# Altium PCB stm32dev.PcbDoc (part 1 of 2)
Units mm, origin at the board's own origin, x right, y up, seen from the top; angles counter-clockwise.
Board outline 57 x 44 mm, 4 copper layers (Top Layer (Signal), Int1 (GND), Int2 (PWR), Bottom Layer (Signal)), stack 1.57 mm thick; 42 components, 50 nets, 191 pads, 142 vias.
Unrouted connection lines stored in the file: 5.
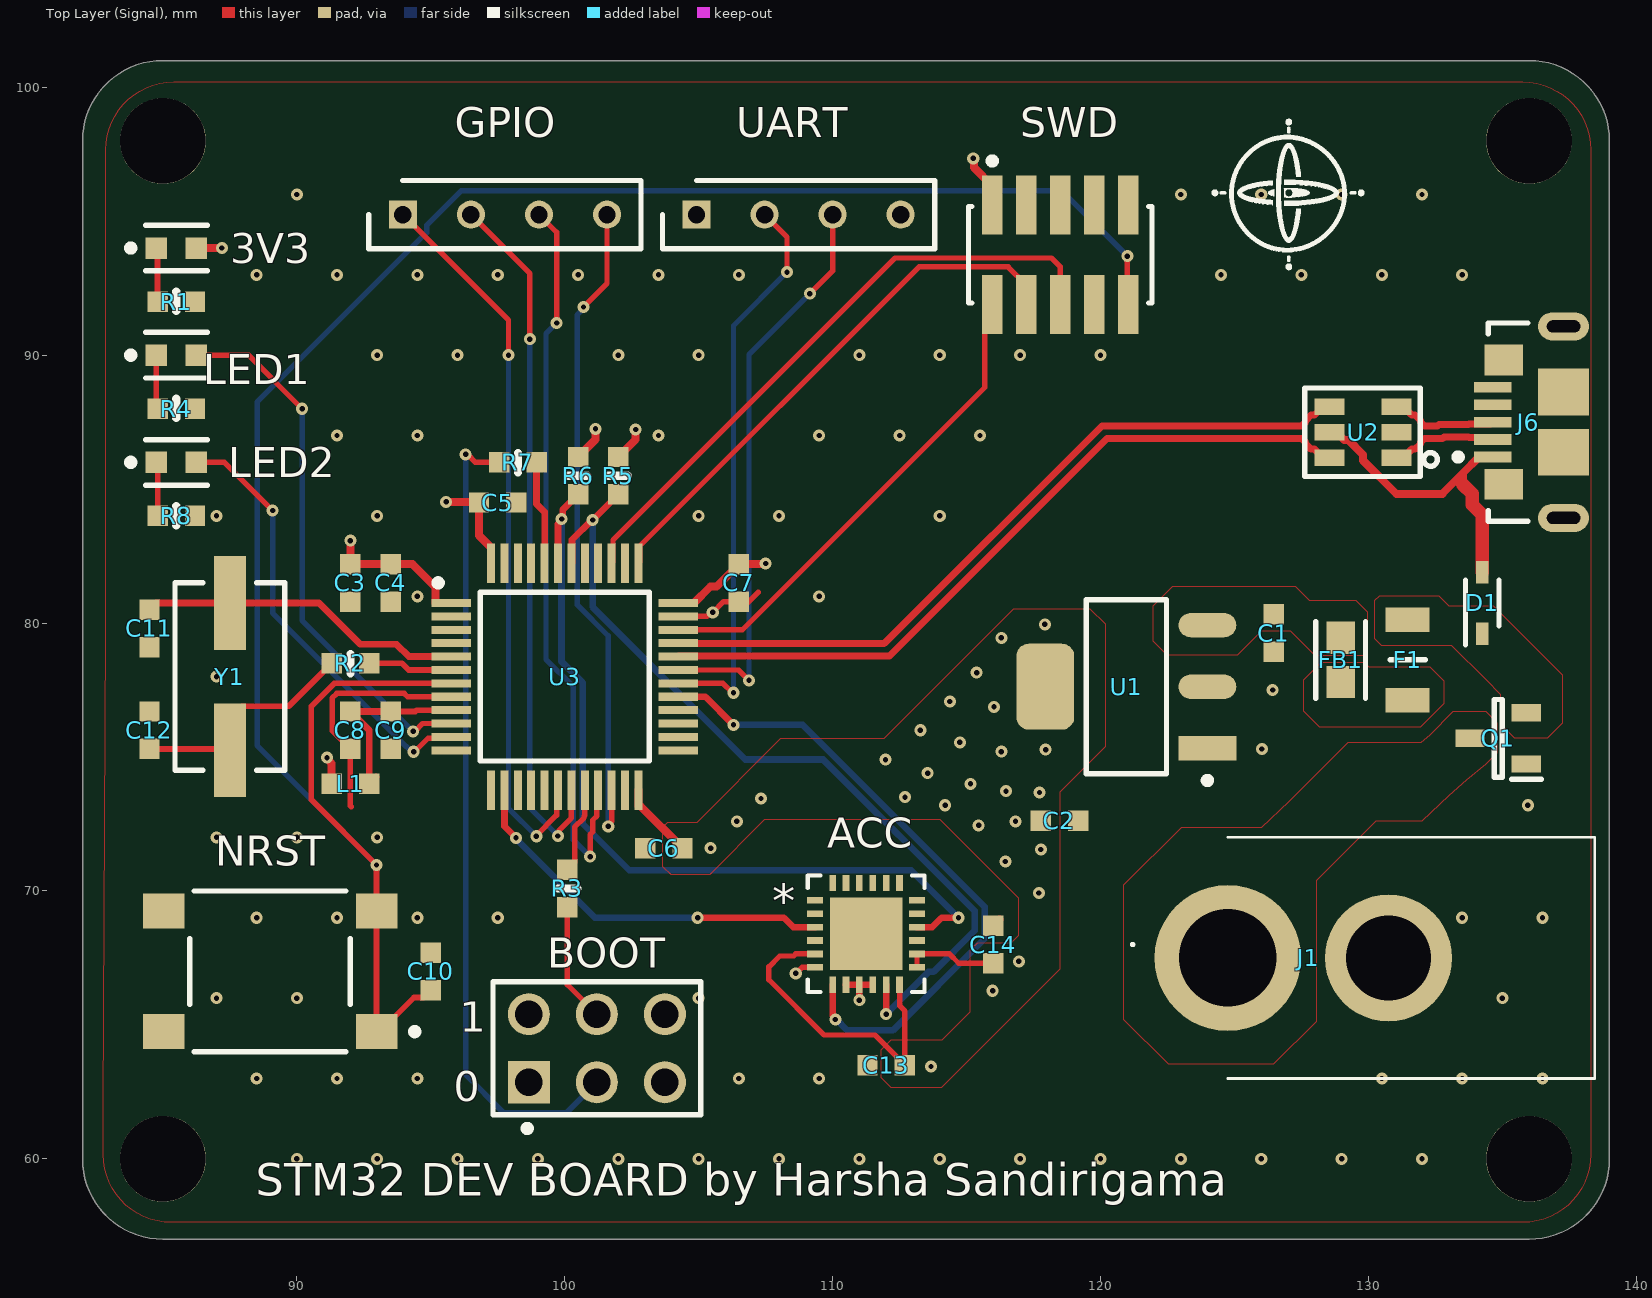
[diagram p0: Top Layer (Signal) view]
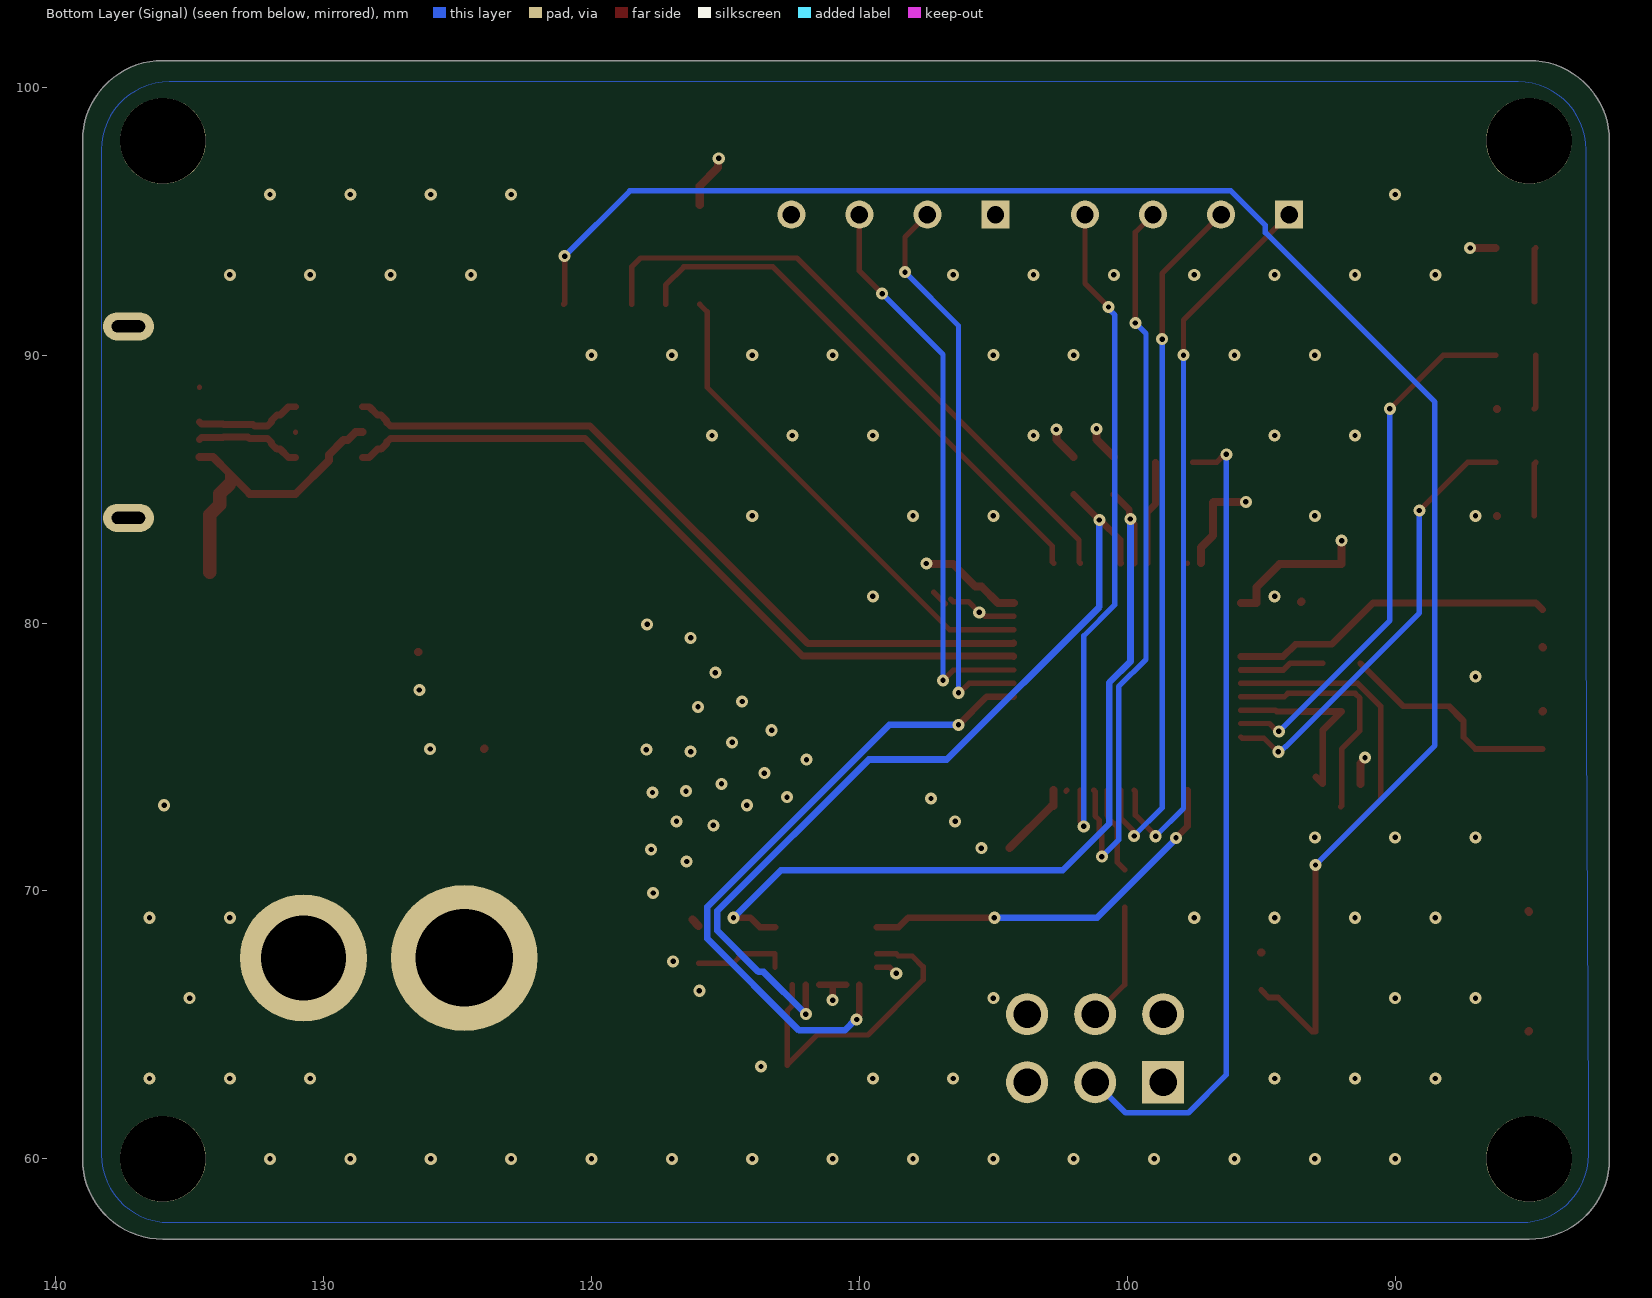
[diagram p1: Bottom Layer (Signal) view, seen from below]
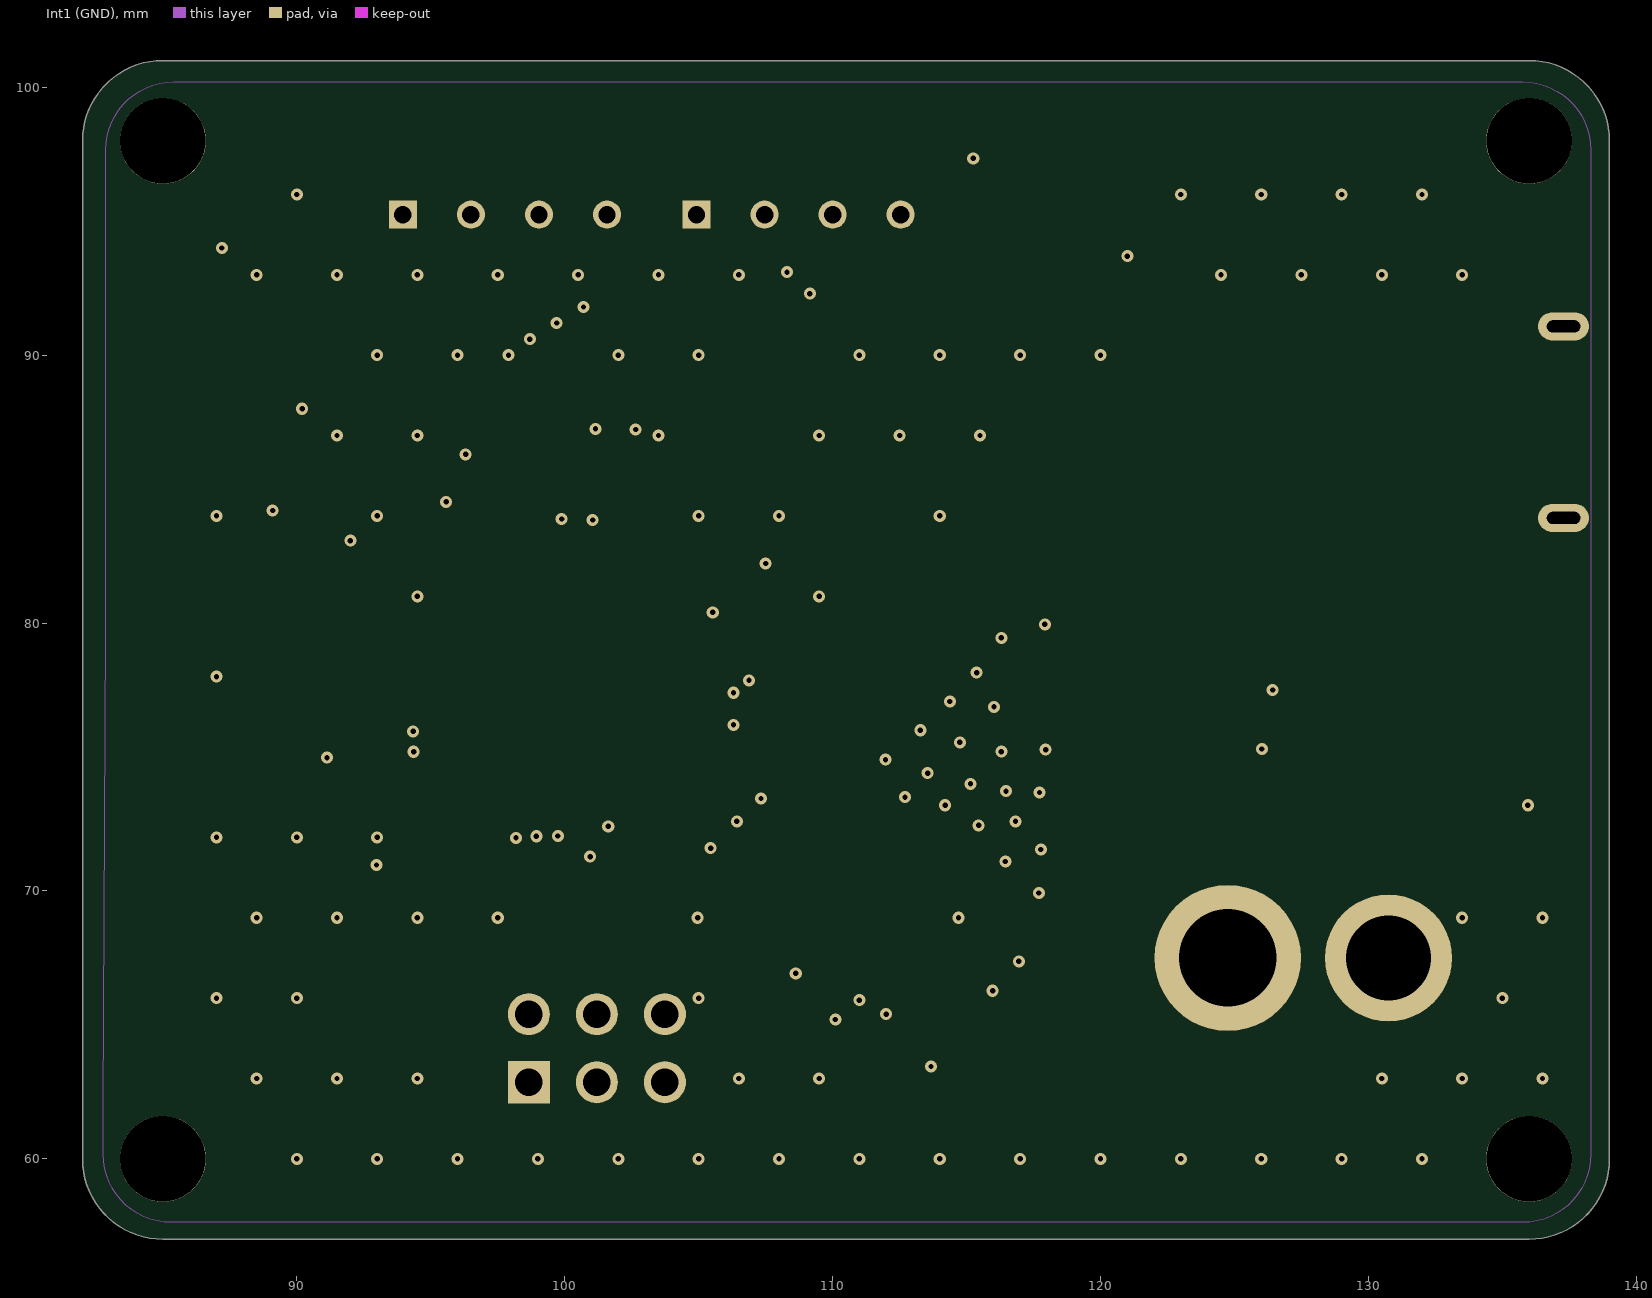
[diagram p2: Int1 (GND)]
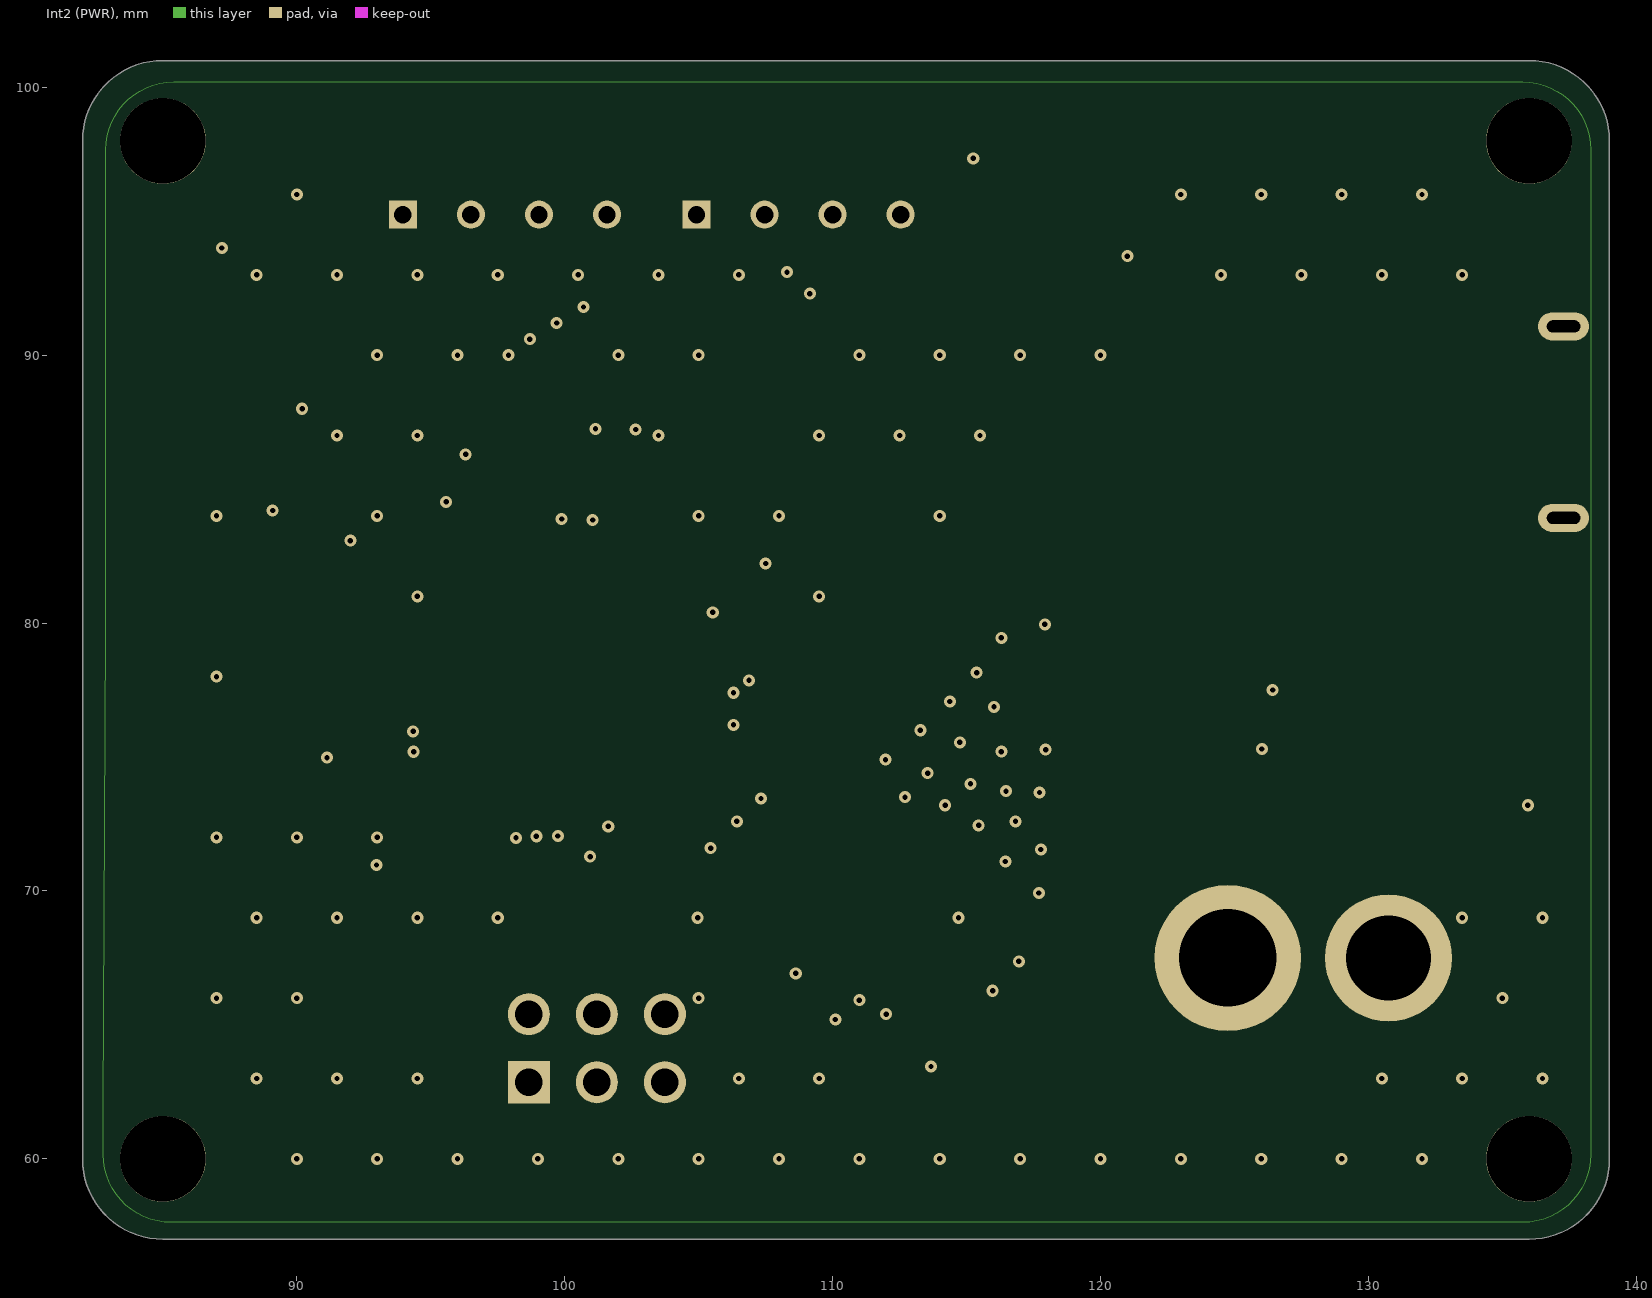
[diagram p3: Int2 (PWR)]
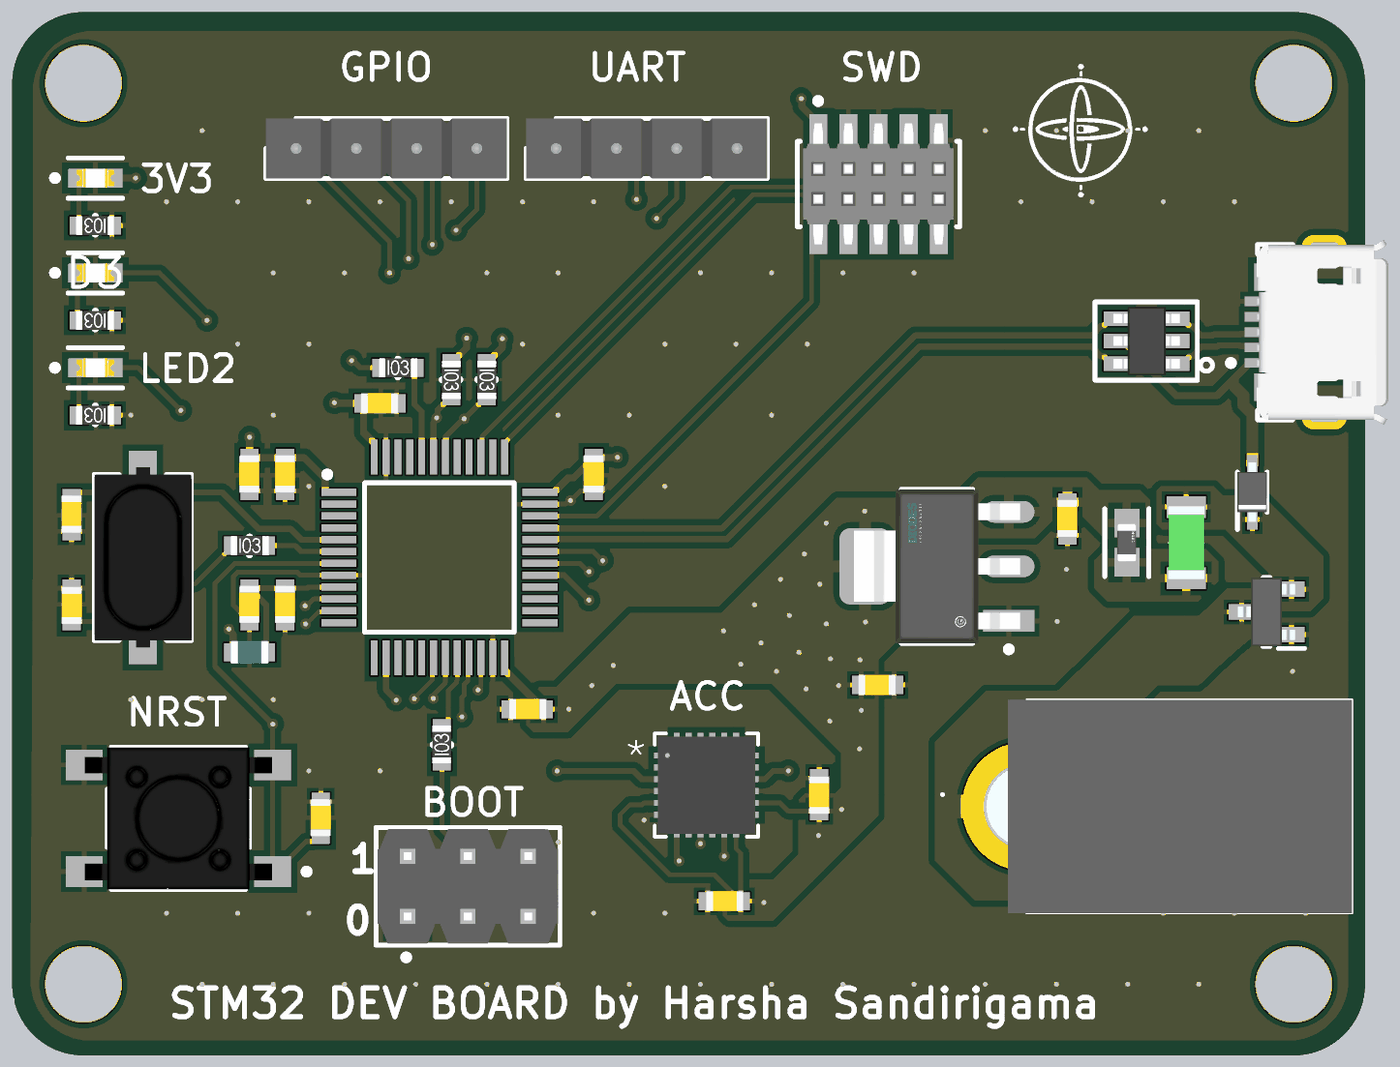
[diagram p4: 3D render of the assembled board from above, using the file's embedded part models]

## Layer stack, top to bottom
Top Solder: solder mask 0.0254, SM-001, Dk 4
Top Layer (Signal): signal copper 0.035
Dielectric 1: prepreg 0.2, PP-017, Dk 4.6
Int1 (GND): signal copper 0.0175
Dielectric 3: core 1.065, Core-039, Dk 4.6
Int2 (PWR): signal copper 0.0175
Dielectric 5: prepreg 0.2, PP-017, Dk 4.6
Bottom Layer (Signal): signal copper 0.035
Bottom Solder: solder mask 0.0254, SM-001, Dk 4

## Board outline
82,60 82,98 cw(c85,98) 85,101 136,101 cw(c136,98) 139,98 139,60 cw(c136,60) 136,57 85,57 cw(c85,60)

## Design rules (kind name [scope] priority, off if disabled: settings)
BoardOutlineClearance [All] p1: gap=0.3 ignorepadtopadclearanceinfootprint=FALSE
Clearance [All] p1: gap=0.254 ignorepadtopadclearanceinfootprint=TRUE except(0.127: Arc-Arc Arc-Track Track-Track SMDPad-SMDPad; 0.2: Arc-SMDPad Track-SMDPad)
ComponentClearance [All] p1: gap=0.102 collisioncheckmode=3 verticalgap=0.102 showdistances=TRUE
DiffPairsRouting [All] p1: maxlimit=0.203 minlimit=0.102 mostfreqgap=0.203 toplayer_mingap=0.203 toplayer_minwidth=0.26 toplayer_maxwidth=0.26 toplayer_prefwidth=0.26 bottomlayer_mingap=0.203 bottomlayer_minwidth=0.26 bottomlayer_maxwidth=0.26 bottomlayer_prefwidth=0.26 impedanceprofiledriven=TRUE impedanceprofileid={1C4CB671-A8B7-4B95-AC9F-C94278357B87} impedanceprofilevalue=90.000000 maxuncoupledlength=12.7
Height [All] p1: minheight=0 maxheight=1816.048 prefheight=12.7
HoleSize [All] p1: absolutevalues=TRUE maxlimit=6.3 minlimit=0.2 maxpercent=80.000 minpercent=20.000
HoleToHoleClearance [All] p1: gap=0.5 allowstackedmicrovias=FALSE
MinimumAnnularRing [All] p1: minimumring=0.13
MinimumSolderMaskSliver [All] p1: minsoldermaskwidth=0
PlaneClearance [All] p1: clearance=0.102
PlaneConnect PlaneConnectPowerPads [InPadClass('PowerPads')] p1: planeconnectstyle=Direct reliefexpansion=0.508 reliefentries=4 reliefconductorwidth=0.254 reliefairgap=0.254
PlaneConnect [All] p2: pad.planeconnectstyle=Relief pad.reliefexpansion=0.3 pad.reliefentries=4 pad.reliefconductorwidth=0.102 pad.reliefairgap=0.102 via.planeconnectstyle=Direct via.reliefexpansion=0.3 via.reliefentries=4 via.reliefconductorwidth=0.127 via.reliefairgap=0.127
PolygonConnect PolygonConnectPowerPads [All vs (InPadClass('PowerPads'))] p1: connectstyle=Direct reliefconductorwidth=0.254 reliefentries=4 polygonreliefangle="90 Angle" airgapwidth=0.254
PolygonConnect [All] p2: thpad.connectstyle=Relief thpad.reliefconductorwidth=0.2 thpad.reliefentries=4 thpad.polygonreliefangle="90 Angle" thpad.airgapwidth=0.2 smdpad.connectstyle=Relief smdpad.reliefconductorwidth=0.2 smdpad.reliefentries=4 smdpad.polygonreliefangle="90 Angle" smdpad.airgapwidth=0.2 via.connectstyle=Direct via.reliefconductorwidth=0.127 via.reliefentries=4 via.polygonreliefangle="90 Angle" via.airgapwidth=0.127
RoutingVias [All] p1: holewidth=0.2 width=0.45 viastyle="Through Hole" minholewidth=0.2 minwidth=0.45 maxholewidth=6.3 maxwidth=6.55
SilkToSilkClearance [All] p1: silktosilkclearance=0
SilkToSolderMaskClearance [IsPad] p1: minsilkscreentomaskgap=0.102 clearancetoexposedcopper=TRUE
SolderMaskExpansion [All] p1: expansion=0.075 istentingtop=FALSE
Width [All] p1: maxlimit=1816.048 minlimit=0.102 preferedwidth=0.3 toplayer_minwidth=0.2 midlayer1_prefwidth=0.102 midlayer2_prefwidth=0.102 bottomlayer_minwidth=0.2 minimp=50.000000 maximp=50.000000 favimp=50.000000
20 further rules are at their usual default settings.

## Classes and differential pairs
differential pair USB_DATA: +USB_DATA_P -USB_DATA_N
differential pair USB_CONN_D: +USB_CONN_D_P -USB_CONN_D_N

## Components (designator, comment, footprint, x,y, rotation, side; value= is the part's Value field where it differs from the comment)
3V3 "LTST-C191KFKT" Lite-On_0_MFG 85.5,94 r0 top (schematic designator D2)
ACC "IIS328DQ" QFN-24_4X4MM_STM 111.25,68.4 r0 top (schematic designator U4)
BOOT "67996-406HLF" Amphenol_ICC_-_FCI_0_MFG 101.2,64.13 r0 top (schematic designator J7)
C1 "4.7uF" "0603C - HD" 126.465,79.625 r90 top
C2 "4.7uF" "0603C - HD" 118.465,72.625 r180 top
C3 "10uF" "0603C - HD" 92,81.5 r90 top
C4 "100nF" "0603C - HD" 93.5,81.5 r90 top
C5 "100nF" "0603C - HD" 97.5,84.5 r180 top
C6 "100nF" "0603C - HD" 103.699,71.6 r0 top
C7 "100nF" "0603C - HD" 106.5,81.5 r90 top
C8 "1uF" "0603C - HD" 92,76 r90 top
C9 "10nF" "0603C - HD" 93.5,76 r90 top
C10 "10nF" "0603C - HD" 95,67 r90 top
C11 "27pF" "0603C - HD" 84.5,79.802 r90 top
C12 "27pF" "0603C - HD" 84.5,76 r270 top
C13 "10uF" "0603C - HD" 112,63.5 r0 top
C14 "100nF" "0603C - HD" 116,68 r270 top
D1 "PMEG4005CEJX" SODFL2512X80N 134.25,80.75 r90 top
F1 "250mA" FUSC3115X66N 131.465,78.625 r270 top
FB1 "MPZ1608Y101BTA00" TDK_MPZ1608-0_8_IPC_A 128.965,78.625 r90 top
GPIO "TS-104-T-AA" HDRV4W46P0X254_1X4_1016X254X808P 93.96,95.25 r0 top (schematic designator J2)
J1 "12V" PJ037AH 124.75,67.5 r180 top
J6 "USB3075-30-A" Global_Connector_Technology_USB3075-30-A_0 137.25,87.5 r90 top
L1 "39nH" "0603L - HD" 92,74 r0 top
LED1 "LTST-C191KFKT" Lite-On_0_MFG 85.5,90 r0 top (schematic designator D3)
LED2 "LTST-C191KFKT" Lite-On_0_MFG 85.5,86 r0 top (schematic designator D4)
NRST "PTS645SM43SMTR92LFS" "C&K_0_MFG - duplicate" 89,67 r180 top (schematic designator SW1)
Q1 "MOSFET P-CH" SOT96P240X110-3N 134.85,75.7 r180 top
R1 "RMCF0603FT1K50" "0603R - HD" 85.5,92 r180 top
R2 "47R" "0603R - HD" 92,78.5 r0 top
R3 "RNCF0603BTE10K0" "0603R - HD" 100.1,70.098 r90 top
R4 "RMCF0603FT1K50" "0603R - HD" 85.5,88 r180 top
R5 "RMCF0603FT2K20" "0603R - HD" 102,85.5 r270 top
R6 "RMCF0603FT2K20" "0603R - HD" 100.5,85.5 r270 top
R7 "RNCF0603BTE10K0" "0603R - HD" 98.251,86 r0 top
R8 "RMCF0603FT1K50" "0603R - HD" 85.5,84 r180 top
SWD "GRPB052VWQS-RC" Sullins_GRPB052VWQS-RC_MFG 118.5,93.75 r0 top (schematic designator J5)
U1 "ZLDO1117G33TA" Diodes_SOT223_IPC_A 120.965,77.625 r180 top
U2 "82400102" SOT23_6L 129.8,87.125 r180 top
U3 "STM32L151C8T6A" QFP50P900X900X160-48N 100,78 r0 top
UART "TS-104-T-AA" HDRV4W46P0X254_1X4_1016X254X808P 104.92,95.25 r0 top (schematic designator J3)
Y1 "16MHz" ECS_Inc._ECS-160-20-3X-TR_0 87.5,78 r270 top

## Footprints (in the part's own frame and the unit in brackets; to place one, negate y for a bottom-side part, rotate by r counter-clockwise, add the part's x,y. Pads: shape width x height; smd on the part's side, far side on the other; paste and mask are expansions set on the pad)
"0603C - HD" [mil] "Capacitor 0603 [Imperial]"
  rect 30x30 smd: 1(-27.5,0) 2(27.5,0)
  body extent -31,-17 32,17, height 31
"0603L - HD" [mil] "Inductor 0603 [Imperial]"
  rect 30x30 smd: 1(-27.5,0) 2(27.5,0)
  body extent -31,-19 31,19, height 31
"0603R - HD" [mil]
  rect 30x30 smd: 1(-27.5,0) 2(27.5,0)
  silkscreen extent 0,-15 0,14, body extent -31,-16 32,16, height 18
Amphenol_ICC_-_FCI_0_MFG [mm]
  rect 1.57x1.57 hole 1.02 paste-1000 mask+0: 1(-2.54,-1.27)
  round 1.57 hole 1.02 paste-1000 mask+0: 2(-2.54,1.27) 3(0,-1.27) 4(0,1.27) 5(2.54,-1.27) 6(2.54,1.27)
  silkscreen extent -3.87,-3.12 3.87,2.48, body extent -3.98,-2.58 3.98,2.58, height 0.25
"C&K_0_MFG - duplicate" [mm]
  rect 1.55x1.3 smd paste+0 mask+0: 1(-3.975,2.25) 2(3.975,2.25) 3(-3.975,-2.25) 4(3.975,-2.25)
  silkscreen extent -5.53,-3 3,3, body extent -4.85,-3.1 4.85,3.1, height 0.25
Diodes_SOT223_IPC_A [mm]
  rect 2.16x0.912 smd paste+0 mask+0: 1(-3.026,2.3)
  rrect100% 2.16x0.912 smd paste+0 mask+0: 2(-3.026,0) 3(-3.026,-2.3)
  rrect42% 2.16x3.212 smd paste+0 mask+0: 4(3.026,0)
  silkscreen extent -3.15,-3.25 1.5,3.62, body extent -4.61,-3.75 4.61,3.75, height 0.25
ECS_Inc._ECS-160-20-3X-TR_0 [mm]
  rect 3.5x1.2 smd paste+0 mask+0: 1(-2.75,0) 2(2.75,0)
  silkscreen extent -3.5,-2.05 3.5,2.05, body extent -4.6,-2.15 4.6,2.15, height 0.25
FUSC3115X66N [mm]
  rect 0.92x1.65 smd: 1(-1.505,0) 2(1.505,0)
  silkscreen extent 0,-0.66 0,0.66, body extent -1.54,-0.76 1.54,0.76, height 0.66
Global_Connector_Technology_USB3075-30-A_0 [mm]
  rect 0.4x1.4 smd paste+0 mask+0: 1(-1.3,2.615) 2(-0.65,2.615) 3(0,2.615) 4(0.65,2.615) 5(1.3,2.615)
  rect 1.15x1.45 smd paste+0 mask+0: 6(-2.32,2.195) 7(2.32,2.195)
  oval 1.05x1.9 hole 1.25 slot 0.45 at 0 deg paste-1000 mask+0: 8(-3.575,-0.035) 11(3.575,-0.035)
  rect 1.75x1.9 smd paste+0 mask+0: 9(-1.125,-0.035) 10(1.125,-0.035)
  silkscreen extent -3.7,1.3 3.7,4.02, body extent -4.2,-2.93 4.2,3.41, height 0.25
HDRV4W46P0X254_1X4_1016X254X808P [mm]
  rect 1.05x1.05 hole 0.65: 1(0,0)
  round 1.05 hole 0.65: 2(2.54,0) 3(5.08,0) 4(7.62,0)
  silkscreen extent -1.27,-1.27 8.89,1.27, body extent -1.27,-1.27 8.89,1.27, height 8.08
Lite-On_0_MFG [mm]
  rect 0.8x0.8 smd paste+0 mask+0: 1(-0.75,0) 2(0.75,0)
  silkscreen extent -1.82,-0.85 1.15,0.85, body extent -1.25,-0.55 1.25,0.55, height 0.25
PJ037AH [mm]
  round 5.46 hole 3.64: 1(0,0)
  round 4.74 hole 3.16: 2(-6,0)
  silkscreen extent -13.7,-4.5 3.6,4.5, body extent -13.7,-4.5 1.72,4.5, height 11.3
QFN-24_4X4MM_STM [mm]
  rect 0.6x0.25 smd paste+0 mask+0: 1(-1.9,1.25) 2(-1.9,0.75) 3(-1.9,0.25) 4(-1.9,-0.25) 5(-1.9,-0.75) 6(-1.9,-1.25) 13(1.9,-1.25) 14(1.9,-0.75) 15(1.9,-0.25) 16(1.9,0.25) 17(1.9,0.75) 18(1.9,1.25)
  rect 0.25x0.6 smd paste+0 mask+0: 7(-1.25,-1.9) 8(-0.75,-1.9) 9(-0.25,-1.9) 10(0.25,-1.9) 11(0.75,-1.9) 12(1.25,-1.9) 19(1.25,1.9) 20(0.75,1.9) 21(0.25,1.9) 22(-0.25,1.9) 23(-0.75,1.9) 24(-1.25,1.9)
  rect 2.7x2.7 smd paste-1.337 mask+0: 25(0,0)
  silkscreen extent -2.18,-2.18 2.18,2.18, body extent -2.05,-2.05 2.05,2.05, height 0.75
QFP50P900X900X160-48N [mm]
  rect 1.475x0.3 smd: 1(-4.238,2.75) 2(-4.238,2.25) 3(-4.238,1.75) 4(-4.238,1.25) 5(-4.238,0.75) 6(-4.238,0.25) 7(-4.238,-0.25) 8(-4.238,-0.75) 9(-4.238,-1.25) 10(-4.238,-1.75) 11(-4.238,-2.25) 12(-4.238,-2.75) 25(4.238,-2.75) 26(4.238,-2.25) 27(4.238,-1.75) 28(4.238,-1.25) 29(4.238,-0.75) 30(4.238,-0.25) 31(4.238,0.25) 32(4.238,0.75) 33(4.238,1.25) 34(4.238,1.75) 35(4.238,2.25) 36(4.238,2.75)
  rect 0.3x1.475 smd: 13(-2.75,-4.238) 14(-2.25,-4.238) 15(-1.75,-4.238) 16(-1.25,-4.238) 17(-0.75,-4.238) 18(-0.25,-4.238) 19(0.25,-4.238) 20(0.75,-4.238) 21(1.25,-4.238) 22(1.75,-4.238) 23(2.25,-4.238) 24(2.75,-4.238) 37(2.75,4.238) 38(2.25,4.238) 39(1.75,4.238) 40(1.25,4.238) 41(0.75,4.238) 42(0.25,4.238) 43(-0.25,4.238) 44(-0.75,4.238) 45(-1.25,4.238) 46(-1.75,4.238) 47(-2.25,4.238) 48(-2.75,4.238)
  silkscreen extent -4.85,-3.15 3.15,3.62, body extent -4.5,-4.5 4.5,4.5, height 1.6
SODFL2512X80N [mm]
  rect 0.84x0.46 smd: 1(-1.15,0) 2(1.15,0)
  silkscreen extent -1.57,-0.63 0.85,0.63, body extent -1.25,-0.63 1.25,0.63, height 0.8
SOT23_6L [mil] "SOT23_6L, 6-Leads, Body 3.60x2.9mm, Pitch 0.95mm"
  rect 44x24 smd: 1(-49.21,37.4) 2(-49.21,0) 3(-49.21,-37.4) 4(49.21,-37.4) 5(49.21,0) 6(49.21,37.4)
  silkscreen extent -109,-65 86,65, body extent -55,-57 55,57, height 44
SOT96P240X110-3N [mm]
  rect 1.1x0.65 smd: 1(-1.05,0.96) 2(-1.05,-0.96) 3(1.05,0)
  silkscreen extent -1.6,-1.45 0.15,1.54, body extent -1.2,-1.45 1.2,1.45, height 1.1
Sullins_GRPB052VWQS-RC_MFG [mm]
  rect 0.76x2.2 smd paste+0 mask+0: 1(-2.54,1.85) 2(-2.54,-1.85) 3(-1.27,1.85) 4(-1.27,-1.85) 5(0,1.85) 6(0,-1.85) 7(1.27,1.85) 8(1.27,-1.85) 9(2.54,1.85) 10(2.54,-1.85)
  silkscreen extent -3.42,-1.8 3.42,3.62, body extent -3.52,-3.05 3.52,3.05, height 0.25
TDK_MPZ1608-0_8_IPC_A [mm]
  rect 1.206x1.058 smd paste+0 mask+0: 1(-0.826,0) 2(0.826,0)
  silkscreen extent -1.43,-0.93 1.43,0.93, body extent -1.93,-1.03 1.93,1.03, height 0.25

## Part data
3V3 LED1 LED2: "Orange 0603 130° Water Clear 90 mcd 2 V SMT Rectangular Flat Top LED", Case Code (Imperial)=0603, Case Code (Metric)=1608, Color=Orange, Forward Current=30mA, Forward Voltage=2V, Lens Color=Colorless, Manufacturer="Vishay Lite-On", Max Operating Temperature=85°C, Min Operating Temperature=-55°C, Package Quantity=1, Power Dissipation=75mW, Reverse Voltage=5V, Supplier Part Number 1=160-1445-1-ND, Test Current=20mA, Case/Package=0603, Category=LEDs, ComponentLink1Description=https://datasheet.ciiva.com/2109/ltst-c191kfkt-2109968.pdf?src-supplier=Digi-Key, ComponentLink1URL=https://datasheet.ciiva.com/2109/ltst-c191kfkt-2109968.pdf?src-supplier=Digi-Key, ComponentLink2Description=https://datasheet.ciiva.com/12400/100-ltst-c191kfkt-39904-12400811.pdf?src-supplier=Mouser, ComponentLink2URL=https://datasheet.ciiva.com/12400/100-ltst-c191kfkt-39904-12400811.pdf?src-supplier=Mouser, ComponentLink3Description=https://datasheet.ciiva.com/11775/0900766b80dc02b0-11775613.pdf?src-supplier=RSComponents, ComponentLink3URL=https://datasheet.ciiva.com/11775/0900766b80dc02b0-11775613.pdf?src-supplier=RSComponents, ComponentLink4Description=https://datasheet.ciiva.com/15201/getdatasheetpartid-631075-15201391.pdf?src-supplier=Verical, ComponentLink4URL=https://datasheet.ciiva.com/15201/getdatasheetpartid-631075-15201391.pdf?src-supplier=Verical, ComponentLink5Description=https://datasheet.ciiva.com/2109/s-110-ltst-c191kfkt-2109969.pdf?src-supplier=Digi-Key, ComponentLink5URL=https://datasheet.ciiva.com/2109/s-110-ltst-c191kfkt-2109969.pdf?src-supplier=Digi-Key, Depth=0.8mm, Dominant Wavelength=605nm, Height=0.55mm, Illumination Color=Orange, Lead Free="Lead Free", Length=1.6mm, Lens Style=Diffused,Colorless,Rectangular, Lens Transparency=Clear, Luminous Intensity=90mcd, Manufacturer Part Number=LTST-C191KFKT, Mount="Surface Mount", Number of Elements=1, Number of LEDs=1, Number of Pins=2, Packaging="Tape and Reel", Power Rating=75mW, Pricing 1="1=0.24000, 10=0.13200, 100=0.06110, 500=0.05640, 1000=0.04418, 2000=0.04324 (USD)", Radiation Hardening=No, RoHS=Yes, RoHS Compliant=Yes, Stock 1=298039, Supplier 1=Digi-Key, Viewing Angle=130°, Wavelength=611nm, Width=0.8mm
ACC: "High Performance Low power 3 axis accelerometer for industrial applications", Case/Package=QFN, Manufacturer=STMicroelectronics, Manufacturer Part Number=IIS328DQTR, Max Operating Temperature=105°C, Max Supply Voltage=3.6V, Min Operating Temperature=-40°C, Min Supply Voltage=2.16V, Supplier Part Number 1=497-15701-1-ND, Axis="X, Y, Z", Bandwidth=500Hz, Category=Accelerometers, ComponentLink1Description=http://www.farnell.com/datasheets/2028146.pdf?src-supplier=Farnell, ComponentLink1URL=http://www.farnell.com/datasheets/2028146.pdf?src-supplier=Farnell, ComponentLink2Description=http://www.st.com/st-web-ui/static/active/en/resource/technical/document/datasheet/DM00150114.pdf?src-supplier=Avnet, ComponentLink2URL=http://www.st.com/st-web-ui/static/active/en/resource/technical/document/datasheet/DM00150114.pdf?src-supplier=Avnet, ComponentLink3Description=http://www.st.com/content/ccc/resource/technical/document/datasheet/24/b9/50/c5/61/ae/4d/58/DM00150114.pdf/files/DM00150114.pdf/jcr:content/translations/en.DM00150114.pdf?src-supplier=Digi-Key, ComponentLink3URL=http://www.st.com/content/ccc/resource/technical/document/datasheet/24/b9/50/c5/61/ae/4d/58/DM00150114.pdf/files/DM00150114.pdf/jcr:content/translations/en.DM00150114.pdf?src-supplier=Digi-Key, ComponentLink4Description=http://www.farnell.com/datasheets/2028146.pdf?src-supplier=Newark, ComponentLink4URL=http://www.farnell.com/datasheets/2028146.pdf?src-supplier=Newark, ComponentLink5Description=http://www.farnell.com/datasheets/2028146.pdf?src-supplier=Element14, ComponentLink5URL=http://www.farnell.com/datasheets/2028146.pdf?src-supplier=Element14, Copyright="Copyright (C) 2021 Ultra Librarian. All rights reserved.", Lead Free="Lead Free", Manufacturer_Part_Number=IIS328DQ, Mfr_Name=STMicroelectronics, Mount="Surface Mount", Number of Pins=24, Output Type=SPI,I2C, Packaging="Cut Tape", Pricing 1="1=5.32000, 10=4.77800, 25=4.51680, 100=3.91440, 500=3.34564 (USD)", REACH SVHC="No SVHC", RefDes=RefDes, RoHS=Yes, Stock 1=30, Supplier 1=Digi-Key, Type=DEV
BOOT: "CONN HEADER VERT 6POS 2.54MM", Color=Black, Current Rating=3A, Insulation Resistance=5GR, Manufacturer="Amphenol ICC / FCI", Max Operating Temperature=125°C, Max Voltage Rating (AC)=1.5kV, Min Operating Temperature=-65°C, Package Quantity=100, Supplier Part Number 1=609-3218-ND, Category="Headers and Wire Housings", ComponentLink1Description=https://datasheet.ciiva.com/46393/1876884-46393070.pdf?src-supplier=Element14, ComponentLink1URL=https://datasheet.ciiva.com/46393/1876884-46393070.pdf?src-supplier=Element14, ComponentLink2Description=https://datasheet.ciiva.com/728/67996-728895.pdf?src-supplier=Digi-Key, ComponentLink2URL=https://datasheet.ciiva.com/728/67996-728895.pdf?src-supplier=Digi-Key, ComponentLink3Description=https://datasheet.ciiva.com/3205/67996-3205613.pdf?src-supplier=Avnet, ComponentLink3URL=https://datasheet.ciiva.com/3205/67996-3205613.pdf?src-supplier=Avnet, ComponentLink4Description=https://datasheet.ciiva.com/16726/67996-16726281.pdf?src-supplier=Avnet+Europe, ComponentLink4URL=https://datasheet.ciiva.com/16726/67996-16726281.pdf?src-supplier=Avnet+Europe, ComponentLink5Description=https://datasheet.ciiva.com/14639/70236872-14639895.pdf?src-supplier=Allied+Electronics, ComponentLink5URL=https://datasheet.ciiva.com/14639/70236872-14639895.pdf?src-supplier=Allied+Electronics, Connector Type="Male Pin", Contact Gender=Male, Contact Material=Bronze, Contact Mating Length=0.23inch, Contact Plating=Tin, Contact Post Length=2.41mm, Contact Type="Male Pin", Depth=4.83mm, Gender=Male, Housing Color=Black, Housing Material=Thermoplastic, Length=7.62mm, Manufacturer Part Number=67996-406HLF, Mount="Through Hole", Number of Contacts=6, Number of Positions=6, Number of Rows=2, Orientation=Straight, Packaging=Bulk, Pitch=2.54mm, Pricing 1="1=0.29000, 10=0.27100, 100=0.18940, 500=0.16234, 1000=0.13528, 5000=0.11595, 10000=0.10822 (USD)", Radiation Hardening=No, REACH SVHC="No SVHC", RoHS=Yes, RoHS Compliant=Yes, Row Spacing=0.1inch, Series=BergStik, Stock 1=5419, Supplier 1=Digi-Key, Termination=Solder, Voltage Rating=1.5kV
C1 C2: library part C1608X7S1A475K080AC, "Cap Ceramic 4.7uF 10V X7S 10% SMD 0603 125°C Punched Paper T/R", Case Code (Imperial)=0603, Case Code (Metric)=1608, Case/Package=LFBGA, Dielectric=X7S, Dielectric Material=Ceramic, Frequency=48MHz, Manufacturer=TDK, Max Operating Temperature=125°C, Min Operating Temperature=-40°C, Package Quantity=1000, Supplier Part Number 1=445-14258-1-ND, Tolerance=10%, Voltage Rating=10V, Capacitance=4.7uF, Category="Ceramic Capacitors", ComponentLink1Description=https://datasheet.ciiva.com/14911/tdkmlcccaprange-14911942.pdf?src-supplier=Digi-Key, ComponentLink1URL=https://datasheet.ciiva.com/14911/tdkmlcccaprange-14911942.pdf?src-supplier=Digi-Key, ComponentLink2Description=https://datasheet.ciiva.com/14911/tdkmlcccaprange-14911943.pdf?src-supplier=Digi-Key, ComponentLink2URL=https://datasheet.ciiva.com/14911/tdkmlcccaprange-14911943.pdf?src-supplier=Digi-Key, ComponentLink3Description=https://datasheet.ciiva.com/14911/tdkmlcccaprange-14911944.pdf?src-supplier=Digi-Key, ComponentLink3URL=https://datasheet.ciiva.com/14911/tdkmlcccaprange-14911944.pdf?src-supplier=Digi-Key, Core Architecture=ARM, Depth=0.8mm, Interface=I2C,SPI,USB,IrDA,UART,USART,EBI/EMI, Lead Free="Lead Free", Length=1.6mm, Manufacturer Part Number=C1608X7S1A475K080AC, Memory Size=64KB, Memory Type=FLASH, Number of I/Os=53, Number of Pins=64, Oscillator Type=Internal, Packaging="Tape and Reel", Peripherals="Brown-out Detect/Reset,POR,PWM,WDT,DMA,LCD", Pricing 1="1=0.30000, 10=0.20700, 50=0.12420, 100=0.10490, 500=0.07176, 1000=0.06348 (USD)", REACH SVHC="No SVHC", RoHS=Yes, RoHS Compliant=Yes, Series="Leopard Gecko", Stock 1=598789, Supplier 1=Digi-Key, Thickness=800um, Voltage Rating (DC)=10V
C3 C13: library part 06036D106MAT2A, "AVX - 06036D106MAT2A - SMD Multilayer Ceramic Capacitor, 10 µF, 6.3 V, 0603 [1608 Metric], ± 20%, X5R, AVX 0603 MLCC", Case Code (Imperial)=0603, Case Code (Metric)=1608, Dielectric=X5R, Dielectric Material=Ceramic, Manufacturer="Kyocera AVX", Max Operating Temperature=85°C, Min Operating Temperature=-55°C, Package Quantity=1, Supplier Part Number 1=478-5318-1-ND, Tolerance=20%, Voltage=6.3V, Capacitance=10uF, Case/Package=0603, Category="Ceramic Capacitors", ComponentLink1Description=https://datasheet.ciiva.com/153/cx5r-153301.pdf?src-supplier=Digi-Key, ComponentLink1URL=https://datasheet.ciiva.com/153/cx5r-153301.pdf?src-supplier=Digi-Key, ComponentLink2Description=https://datasheet.ciiva.com/153/cx5r-153302.pdf?src-supplier=Digi-Key, ComponentLink2URL=https://datasheet.ciiva.com/153/cx5r-153302.pdf?src-supplier=Digi-Key, ComponentLink3Description=https://datasheet.ciiva.com/153/cx5r-153303.pdf?src-supplier=Digi-Key, ComponentLink3URL=https://datasheet.ciiva.com/153/cx5r-153303.pdf?src-supplier=Digi-Key, ComponentLink4Description=https://datasheet.ciiva.com/5422/cx5r-33896-5422935.pdf?src-supplier=Mouser, ComponentLink4URL=https://datasheet.ciiva.com/5422/cx5r-33896-5422935.pdf?src-supplier=Mouser, ComponentLink5Description=https://datasheet.ciiva.com/2987/cx5r-2987866.pdf?src-supplier=Avnet, ComponentLink5URL=https://datasheet.ciiva.com/2987/cx5r-2987866.pdf?src-supplier=Avnet, ComponentLink6Description=https://datasheet.ciiva.com/2987/cx5r-2987867.pdf?src-supplier=Avnet, ComponentLink6URL=https://datasheet.ciiva.com/2987/cx5r-2987867.pdf?src-supplier=Avnet, ComponentLink7Description=https://datasheet.ciiva.com/14591/70001028-14591754.pdf?src-supplier=Allied+Electronics, ComponentLink7URL=https://datasheet.ciiva.com/14591/70001028-14591754.pdf?src-supplier=Allied+Electronics, ComponentLink8Description=https://datasheet.ciiva.com/16201/cx5r-16201627.pdf?src-supplier=Future+Electronics, ComponentLink8URL=https://datasheet.ciiva.com/16201/cx5r-16201627.pdf?src-supplier=Future+Electronics, ComponentLink9Description=https://datasheet.ciiva.com/1458/1796776-1458117.pdf?src-supplier=Element14, ComponentLink9URL=https://datasheet.ciiva.com/1458/1796776-1458117.pdf?src-supplier=Element14, ComponentLink10Description=https://datasheet.ciiva.com/16538/cx5r-16538025.pdf?src-supplier=Avnet+Asia, ComponentLink10URL=https://datasheet.ciiva.com/16538/cx5r-16538025.pdf?src-supplier=Avnet+Asia, Construction=Flat, Contact Plating=Tin,Matte, Depth=0.81mm, Height=0.9mm, Lead Free="Lead Free", Length=1.6mm, Manufacturer Part Number=06036D106MAT2A, Mount="Surface Mount,PCB", Number of Pins=2, Packaging="Tape and Reel", Pricing 1="1=0.22000, 10=0.14900, 50=0.08940, 100=0.07550, 500=0.05164, 1000=0.04568 (USD)", Pricing 2="1=0.22000, 10=0.14900, 50=0.08940, 100=0.07550, 500=0.05164, 1000=0.04568 (USD)", Radiation Hardening=No, REACH SVHC="No SVHC", RoHS=Yes, RoHS Compliant=Yes, Series=-, Stock 1=923568, Stock 2=923568, Supplier 1=Digi-Key, Supplier 2=Digi-Key, Supplier Part Number 2=478-5318-6-ND, Termination=SMD/SMT, Thickness=0.035inch, Voltage Rating=6.3V, Voltage Rating (DC)=6.3V, Width=0.032inch
C4 C5 C6 C7 C14: library part CL10B104KB8VPJC, "0.1 µF ±10% 50V Ceramic Capacitor X7R 0603 (1608 Metric)", Manufacturer=Samsung, Supplier Part Number 1=1276-CL10B104KB8VPJCCT-ND, Category="Ceramic Capacitors", Manufacturer Part Number=CL10B104KB8VPJC, Pricing 1="1=0.15000, 10=0.11000, 50=0.06240, 100=0.05180, 500=0.03630, 1000=0.03005 (USD)", Pricing 2="1=0.16000, 10=0.07500, 50=0.07500, 100=0.05500, 1000=0.03400, 10000=0.02400 (USD)", RoHS=Yes, Stock 2=5857, Supplier 1=Digi-Key, Supplier 2=Mouser, Supplier Part Number 2=187-CL10B104KB8VPJC
C8: library part 0603BB105K160YT, "CAP CER 1UF 16V X7R 0603", Case/Package=0603, Manufacturer="Knowles Novacap", Max Operating Temperature=125°C, Min Operating Temperature=-55°C, Supplier Part Number 1=1763-1175-1-ND, Tolerance=10%, Voltage Rating=16V, Capacitance=1uF, Category="Ceramic Capacitors", ComponentLink1Description=http://www.knowlescapacitors.com/getmedia/b8129730-c7fe-4622-a4e1-683ad9deee84/Novacap_catalog_9345-14.aspx?src-supplier=Digi-Key, ComponentLink1URL=http://www.knowlescapacitors.com/getmedia/b8129730-c7fe-4622-a4e1-683ad9deee84/Novacap_catalog_9345-14.aspx?src-supplier=Digi-Key, Manufacturer Part Number=0603BB105K160YT, Mount="Surface Mount", Packaging="Cut Tape", RoHS=No, Supplier 1=Digi-Key
C9 C10: library part CL10B103KB8WPJC, "Capacitor Ceramic 0.01uF 10% 50V 2-Pin Surface Mount T/R", Manufacturer=Samsung, Supplier Part Number 1=1276-CL10B103KB8WPJCCT-ND, Category="Ceramic Capacitors", Manufacturer Part Number=CL10B103KB8WPJC, Pricing 1="1=0.11000, 10=0.08100, 50=0.04620, 100=0.03830, 500=0.02684, 1000=0.02222 (USD)", RoHS=Yes, RoHS Compliant=Yes, Stock 1=74489, Supplier 1=Digi-Key
C11 C12: library part 06035A270JAT2A, "CAP MLCC, 27PF, 50V, C0G/NP0, 5%, 0603", Case Code (Imperial)=0603, Case Code (Metric)=1608, Dielectric=C0G, Manufacturer="Kyocera AVX", Max Operating Temperature=125°C, Min Operating Temperature=-55°C, Package Quantity=1, Supplier Part Number 1=478-1168-1-ND, Temperature Coefficient=0ppm/°C, Tolerance=5%, Voltage=50V, Capacitance=27pF, Case/Package=0603, Category="Ceramic Capacitors", ComponentLink1Description=https://datasheet.ciiva.com/22738/759117-22738072.pdf?src-supplier=Element14, ComponentLink1URL=https://datasheet.ciiva.com/22738/759117-22738072.pdf?src-supplier=Element14, ComponentLink2Description=https://datasheet.ciiva.com/7855/759117-7855066.pdf?src-supplier=Element14, ComponentLink2URL=https://datasheet.ciiva.com/7855/759117-7855066.pdf?src-supplier=Element14, ComponentLink3Description=https://datasheet.ciiva.com/150/ccog-150312.pdf?src-supplier=Digi-Key, ComponentLink3URL=https://datasheet.ciiva.com/150/ccog-150312.pdf?src-supplier=Digi-Key, ComponentLink4Description=https://datasheet.ciiva.com/150/ccog-150311.pdf?src-supplier=Digi-Key, ComponentLink4URL=https://datasheet.ciiva.com/150/ccog-150311.pdf?src-supplier=Digi-Key, ComponentLink5Description=https://datasheet.ciiva.com/150/ccog-150313.pdf?src-supplier=Digi-Key, ComponentLink5URL=https://datasheet.ciiva.com/150/ccog-150313.pdf?src-supplier=Digi-Key, Contact Plating=Tin,Matte, Depth=0.81mm, Height=0.63mm, Lead Free="Lead Free", Length=1.6mm, Manufacturer Part Number=06035A270JAT2A, Mount="Surface Mount", Number of Pins=2, Packaging="Tape and Reel", Pricing 1="1=0.10000, 10=0.07000, 50=0.03800, 100=0.03100, 500=0.02214, 1000=0.01739 (USD)", Radiation Hardening=No, REACH SVHC="No SVHC", RoHS=Yes, Stock 1=36247, Supplier 1=Digi-Key, Termination=SMD/SMT, Thickness=0.035inch, Voltage Rating=50V, Voltage Rating (DC)=50V, Width=0.81mm
D1: "Rectifier Diode Schottky 40V 0.5A 1.8ns Automotive 2-Pin SOD-323F T/R", Manufacturer=Nexperia, Mouser Part Number=771-PMEG4005CEJX, Supplier Part Number 1=1727-8169-1-ND, Arrow Part Number=PMEG4005CEJX, Arrow Price/Stock=https://www.arrow.com/en/products/pmeg4005cejx/nexperia?region=nac, Category="Schottky Diodes", Datasheet Link=https://www.arrow.com/en/products/pmeg4005cejx/nexperia, Height=0.8mm, Manufacturer Part Number=PMEG4005CEJX, Manufacturer_Name=Nexperia, Manufacturer_Part_Number=PMEG4005CEJX, Mouser Price/Stock=https://www.mouser.co.uk/ProductDetail/Nexperia/PMEG4005CEJX?qs=1fQ7IOp4Wri3RvgD47E2KA%3D%3D, Pricing 1="1=0.42000, 10=0.30900, 100=0.17490, 500=0.11584, 1000=0.08880 (USD)", RoHS=Yes, RoHS Compliant=Yes, Stock 1=29989, Supplier 1=Digi-Key
F1: library part C1Q250, "Fuse Chip Very Fast Acting 0.25A 125V SMD Solder Pad 1206 Ceramic T/R CE/CSA/cULus", Case Code (Imperial)=1206, Case Code (Metric)=3216, DC Cold Resistance=880mR, Manufacturer=Bel, Manufacturer_Name="Stewart Connector", Max Operating Temperature=125°C, Max Voltage Rating (DC)=63V, Min Operating Temperature=-55°C, Power Dissipation=100mW, Supplier Part Number 1=507-1073-1-ND, Voltage Rating=125V, Approvals=CSA,cULus,CE, Case/Package=1206, Category=Fuses, ComponentLink1Description=https://datasheet.ciiva.com/300/c1q-300584.pdf?src-supplier=Digi-Key, ComponentLink1URL=https://datasheet.ciiva.com/300/c1q-300584.pdf?src-supplier=Digi-Key, ComponentLink2Description=https://datasheet.ciiva.com/300/c1q-300585.pdf?src-supplier=Digi-Key, ComponentLink2URL=https://datasheet.ciiva.com/300/c1q-300585.pdf?src-supplier=Digi-Key, ComponentLink3Description=https://datasheet.ciiva.com/300/c1q-300586.pdf?src-supplier=Digi-Key, ComponentLink3URL=https://datasheet.ciiva.com/300/c1q-300586.pdf?src-supplier=Digi-Key, ComponentLink4Description=https://datasheet.ciiva.com/8264/c1q-8264010.pdf?src-supplier=Avnet, ComponentLink4URL=https://datasheet.ciiva.com/8264/c1q-8264010.pdf?src-supplier=Avnet, Contact Plating=Tin, Current Rating=250mA, Datasheet Link=https://datasheet.datasheetarchive.com/originals/distributors/Datasheets-6/DSA-118457.pdf, Depth=1.52mm, Fuse Type="Board Mount (Cartridge Style Excluded)", Height=0.66mm, Housing Material=Ceramic, Lead Free="Lead Free", Length=3.07mm, Manufacturer Part Number=C1Q250, Manufacturer_Part_Number=C1Q250, Mount="Surface Mount", Number of Pins=2, Packaging="Tape and Reel", Pricing 1="1=0.32000, 5=0.31200, 10=0.29900, 50=0.26680, 100=0.24840, 250=0.22080, 500=0.18400, 1000=0.17480 (USD)", RoHS=Yes, RoHS Compliant=Yes, Series=C1Q, Stock 1=66554, Supplier 1=Digi-Key, Voltage Rating (AC)=125V, Voltage Rating (DC)=63V, Width=0.062inch
FB1: "Ind Chip Bead Multi-Layer 100Ohm 25% 100MHz Ferrite 2A 0603 Punched Paper T/R", Case Code (Imperial)=0603, Case Code (Metric)=1608, Current Rating=2A, DC Resistance (DCR)=40mR, Manufacturer=TDK, Package Quantity=4000, Supplier Part Number 1=445-2984-1-ND, Tolerance=25%, Case/Package=0603, Category="Ferrite Beads and Chips", ComponentLink1Description=https://datasheet.ciiva.com/46634/beads-commercial-power-mpz-en-46634621.pdf?src-supplier=Digi-Key, ComponentLink1URL=https://datasheet.ciiva.com/46634/beads-commercial-power-mpz-en-46634621.pdf?src-supplier=Digi-Key, ComponentLink2Description=https://datasheet.ciiva.com/46634/beads-commercial-power-mpz-en-46634677.pdf?src-supplier=Digi-Key, ComponentLink2URL=https://datasheet.ciiva.com/46634/beads-commercial-power-mpz-en-46634677.pdf?src-supplier=Digi-Key, ComponentLink3Description=https://datasheet.ciiva.com/46634/beads-commercial-power-mpz-en-46634684.pdf?src-supplier=Digi-Key, ComponentLink3URL=https://datasheet.ciiva.com/46634/beads-commercial-power-mpz-en-46634684.pdf?src-supplier=Digi-Key, ComponentLink4Description=https://datasheet.ciiva.com/48682/beads-commercial-power-mpz-en-48682501.pdf?src-supplier=Avnet, ComponentLink4URL=https://datasheet.ciiva.com/48682/beads-commercial-power-mpz-en-48682501.pdf?src-supplier=Avnet, Core Material=Ferrite, Height=0.037inch, Impedance=100R, Length=0.063inch, Manufacturer Part Number=MPZ1608Y101BTA00, Max DC Current=2A, Mount="Surface Mount", Packaging="Tape and Reel", Pricing 1="1=0.10000, 10=0.07900, 25=0.07160, 50=0.06440, 100=0.04720, 250=0.03432, 500=0.03146, 1000=0.02717 (USD)", REACH SVHC="No SVHC", RoHS=Yes, RoHS Compliant=Yes, Series=MPZ, Stock 1=221776, Supplier 1=Digi-Key, Width=0.031inch
GPIO UART: "Connector", Manufacturer_Name=SAMTEC, Mouser Part Number=200-TS104TAA, Arrow Part Number=TS-104-T-AA, Arrow Price/Stock=https://www.arrow.com/en/products/ts-104-t-aa/samtec?region=nac, Datasheet Link=https://componentsearchengine.com/Datasheets/2/TS-104-T-AA.pdf, Height=8.08mm, Manufacturer_Part_Number=TS-104-T-AA, Mouser Price/Stock=https://www.mouser.co.uk/ProductDetail/Samtec/TS-104-T-AA?qs=0lQeLiL1qyZ41w70Oe2T%2Fg%3D%3D
J1: library part PJ-037AH, "CONN PWR JACK 2X5.5MM SOLDER", Color=Black, Current Rating=5A, Flammability Rating="UL94 V-0", Insulation Resistance=100MR, Manufacturer=CUI, Manufacturer_Name="CUI Inc.", Max Operating Temperature=85°C, Min Operating Temperature=-25°C, Mouser Part Number=490-PJ-037AH, Package Quantity=500, Supplier Part Number 1=CP-037AH-ND, Voltage Rating=24V, Arrow Part Number=PJ-037AH, Arrow Price/Stock=https://www.arrow.com/en/products/pj-037ah/cui-devices?region=nac, Category=Connectors, ComponentLink1Description=http://www.mouser.com/ds/2/670/pj-037ah-516064.pdf?src-supplier=Mouser, ComponentLink1URL=http://www.mouser.com/ds/2/670/pj-037ah-516064.pdf?src-supplier=Mouser, ComponentLink2Description=https://www.cui.com/product/resource/digikeypdf/pj-037ah.pdf?src-supplier=Digi-Key, ComponentLink2URL=https://www.cui.com/product/resource/digikeypdf/pj-037ah.pdf?src-supplier=Digi-Key, Connector Type=Jack, Contact Gender=Male, Contact Material=Copper, Contact Plating=Nickel, Datasheet Link=https://www.arrow.com/en/products/pj-037ah/cui-devices, Gender=Male, Height=11.2mm, Housing Color=Black, Housing Material=Thermoplastic, Lead Free="Lead Free", Manufacturer Part Number=PJ-037AH, Manufacturer_Part_Number=PJ-037AH, Mount="Through Hole", Mouser Price/Stock=https://www.mouser.co.uk/ProductDetail/CUI-Devices/PJ-037AH?qs=WyjlAZoYn50M7m1AkzfPaQ%3D%3D, Number of Conductors=2, Orientation=Horizontal, Pricing 1="1=0.71000, 10=0.62200, 25=0.56880, 50=0.53520, 100=0.51290, 250=0.46832, 500=0.44600, 1000=0.36795, 2500=0.33450 (USD)", RoHS=Yes, RoHS Compliant=Yes, Series=-, Shielding=Unshielded, Stock 1=64914, Supplier 1=Digi-Key, Termination=Solder
J6: "Conn Micro USB Type B RCP 2Power/3Signal POS 0.65mm Solder RA SMD 5 Terminal 1 Port T/R", Manufacturer="Global Connector Technology", Supplier Part Number 1=69AC6678, Category="USB Connectors", ComponentLink1Description=https://datasheet.ciiva.com/5803/usb3075-5803809.pdf?src-supplier=Farnell, ComponentLink1URL=https://datasheet.ciiva.com/5803/usb3075-5803809.pdf?src-supplier=Farnell, ComponentLink2Description=https://datasheet.ciiva.com/46420/usb3075-46420605.pdf?src-supplier=Element14, ComponentLink2URL=https://datasheet.ciiva.com/46420/usb3075-46420605.pdf?src-supplier=Element14, ComponentLink3Description=https://datasheet.ciiva.com/7633/1912469-7633847.pdf?src-supplier=Element14, ComponentLink3URL=https://datasheet.ciiva.com/7633/1912469-7633847.pdf?src-supplier=Element14, ComponentLink4Description=https://datasheet.ciiva.com/16502/usb3075-16502716.pdf?src-supplier=Future+Electronics, ComponentLink4URL=https://datasheet.ciiva.com/16502/usb3075-16502716.pdf?src-supplier=Future+Electronics, Connector Type=USB, Contact Material="Copper Alloy", Contact Plating=Gold, Gender=Receptacle, Height=0.525inch, Lead Free="Lead Free", Length=0.525inch, Manufacturer Part Number=USB3075-30-A, Mount="Surface Mount", Number of Contacts=5, Orientation="Right Angle", Pricing 1="1=0.87500, 250=0.67300, 500=0.60600, 1000=0.55200, 1500=0.55200, 5000=0.50500 (USD)", Pricing 2="1500=0.33300, 7500=0.32600, 15000=0.32000, 30000=0.31300 (GBP)", REACH SVHC="No SVHC", RoHS=Yes, RoHS Compliant=Yes, Series=USB3075, Stock 1=25500, Stock 2=25500, Supplier 1=Newark, Supplier 2=Farnell, Supplier Part Number 2=2443116, Termination=SMD/SMT, USB Standard="USB 2.0", Weight=0.001lb, Width=0.525inch
L1: library part HK160839NJ-T, "Ind High Frequency Chip Multi-Layer 39nH 5% 100MHz 12Q-Factor Ceramic 300mA 0603 T/R", Case Code (Imperial)=0603, Case Code (Metric)=1608, Current Rating=300mA, DC Resistance (DCR)=600mR, Inductance Tolerance=5%, Manufacturer="Taiyo Yuden", Max Operating Temperature=85°C, Min Operating Temperature=-40°C, Package Quantity=4000, Self Resonant Frequency=1.1GHz, Supplier Part Number 1=587-1552-1-ND, Test Frequency=100MHz, Body Material=Ceramic, Case/Package=0603, Category="Fixed Inductors", ComponentLink1Description=https://datasheet.ciiva.com/8499/hk160839nj-t-ss-8499010.pdf?src-supplier=Avnet, ComponentLink1URL=https://datasheet.ciiva.com/8499/hk160839nj-t-ss-8499010.pdf?src-supplier=Avnet, ComponentLink2Description=https://datasheet.ciiva.com/30193/1171hk160839nj-t-30193223.pdf?src-supplier=Onlinecomponents.com, ComponentLink2URL=https://datasheet.ciiva.com/30193/1171hk160839nj-t-30193223.pdf?src-supplier=Onlinecomponents.com, ComponentLink3Description=https://datasheet.ciiva.com/7153/hk160839nj-t-ss-7153953.pdf?src-supplier=Newark, ComponentLink3URL=https://datasheet.ciiva.com/7153/hk160839nj-t-ss-7153953.pdf?src-supplier=Newark, Core Material=Ferrite,Ceramic, Halogen Free="Halogen Free", Height=0.8mm, Height - Seated (Max)=0.037inch, Inductance=39nH, Lead Free=Exempt, Length=0.063inch, Manufacturer Part Number=HK160839NJ-T, Max DC Current=300mA, Mount="Surface Mount", Number of Pins=2, Packaging="Tape and Reel", Pricing 1="1=0.11000, 10=0.09600, 25=0.08560, 50=0.07280, 100=0.06430, 250=0.05892, 500=0.05356, 1000=0.04498 (USD)", Q Factor=12, REACH SVHC=Unknown, RoHS=Yes, RoHS Compliant=Yes, Series=HK, Shielding=Unshielded, Stock 1=39663, Supplier 1=Digi-Key, Termination=SMD/SMT, Tolerance=5%, Width=0.031inch
NRST: "SWITCH TACTILE SPST-NO 0.05A 12V", Case/Package=SMD/SMT, Color=Black, Contact Resistance=100mR, Current Rating=50mA, Manufacturer="ITT C&K", Max Operating Temperature=60°C, Max Voltage Rating (DC)=12V, Min Operating Temperature=-20°C, Operating Force=160gf, Package Quantity=1, Supplier Part Number 1=CKN9112CT-ND, Actuator Length=0.85mm, Actuator Material=Nylon,Polyamide,PA66, Actuator Type=Standard, Category="Tactile Switches", ComponentLink1Description=https://datasheet.ciiva.com/29931/getdatasheetpartid-764615-29931183.pdf?src-supplier=Verical, ComponentLink1URL=https://datasheet.ciiva.com/29931/getdatasheetpartid-764615-29931183.pdf?src-supplier=Verical, ComponentLink2Description=https://datasheet.ciiva.com/29903/getdatasheetpartid-786341-29903846.pdf?src-supplier=Verical, ComponentLink2URL=https://datasheet.ciiva.com/29903/getdatasheetpartid-786341-29903846.pdf?src-supplier=Verical, ComponentLink3Description=https://datasheet.ciiva.com/14920/pts645-14920733.pdf?src-supplier=Digi-Key, ComponentLink3URL=https://datasheet.ciiva.com/14920/pts645-14920733.pdf?src-supplier=Digi-Key, ComponentLink4Description=https://datasheet.ciiva.com/14920/pts645-14920734.pdf?src-supplier=Digi-Key, ComponentLink4URL=https://datasheet.ciiva.com/14920/pts645-14920734.pdf?src-supplier=Digi-Key, ComponentLink5Description=https://datasheet.ciiva.com/14920/pts645-14920735.pdf?src-supplier=Digi-Key, ComponentLink5URL=https://datasheet.ciiva.com/14920/pts645-14920735.pdf?src-supplier=Digi-Key, Contact Material=Silver, Contact Plating=Silver, Depth=9mm, Illumination Type=Non-Illuminated,Illuminated, Lead Free="Lead Free", Length=6mm, Manufacturer Part Number=PTS645SM43SMTR92LFS, Max Current Rating=50mA, Mechanical Life=100000Cycles, Mount="Surface Mount", Orientation=Straight, Packaging="Tape and Reel", Pricing 1="1=0.25000, 10=0.24200, 25=0.22960, 100=0.20780, 250=0.18944, 500=0.17610 (USD)", REACH SVHC="No SVHC", RoHS=Yes, RoHS Compliant=Yes, Series=PTS645, Size=6mm, Stock 1=1121749, Supplier 1=Digi-Key, Switch Function=Off-Mom, Termination="Gull Wing", Throw Configuration=SPST, Voltage Rating (DC)=12V
Q1: library part DMP3130LQ-7, "Trans MOSFET P-CH 30V 3.5A Automotive 3-Pin SOT-23 T/R", Case/Package=TO-236-3, Continuous Drain Current (ID)=3.5A, Drain to Source Resistance=150mR, Drain to Source Voltage (Vdss)=30V, Input Capacitance=864pF, Manufacturer=Diodes, Manufacturer_Name="Diodes Inc.", Max Operating Temperature=150°C, Max Power Dissipation=700mW, Min Operating Temperature=-55°C, Mouser Part Number=621-DMP3130LQ-7, Supplier Part Number 1=DMP3130LQ-7DICT-ND, Arrow Part Number=DMP3130LQ-7, Arrow Price/Stock=https://www.arrow.com/en/products/dmp3130lq-7/diodes-incorporated, Category=MOSFETs, ComponentLink1Description=https://datasheet.ciiva.com/16438/ds31524-16438717.pdf?src-supplier=Future+Electronics, ComponentLink1URL=https://datasheet.ciiva.com/16438/ds31524-16438717.pdf?src-supplier=Future+Electronics, Datasheet Link=https://componentsearchengine.com/Datasheets/1/DMP3130LQ-7.pdf, Height=1.1mm, Lead Free="Lead Free", Manufacturer Part Number=DMP3130LQ-7, Manufacturer_Part_Number=DMP3130LQ-7, Mount="Surface Mount", Mouser Price/Stock=https://www.mouser.co.uk/ProductDetail/Diodes-Incorporated/DMP3130LQ-7?qs=IXOKsUZacBE0XFAwZisciA%3D%3D, Packaging="Cut Tape", Pricing 1="1=0.50000, 10=0.40700, 100=0.27740, 500=0.20804, 1000=0.15602 (USD)", Rds On Max=77mR, REACH SVHC="No SVHC", RoHS=Yes, RoHS Compliant=Yes, Stock 1=432, Supplier 1=Digi-Key
R1 R4 R8: "Res Thick Film 0603 1.5K Ohm 1% 0.1W(1/10W) ±100ppm/C Pad SMD Automotive T/R", Case Code (Imperial)=0603, Case Code (Metric)=1608, Manufacturer="Stackpole Electronics", Max Operating Temperature=155°C, Max Power Dissipation=100mW, Min Operating Temperature=-55°C, Resistance=1.5kR, Resistor Type="Thick Film", Supplier Part Number 1=RMCF0603FT1K50CT-ND, Temperature Coefficient=100ppm/°C, Tolerance=1%, Case/Package=0603, Category="Chip SMD Resistors", ComponentLink1Description=http://components.arrow.com/part/dataview/44988068S6965504N1174?src-supplier=Arrow+Electronics, ComponentLink1URL=http://components.arrow.com/part/dataview/44988068S6965504N1174?src-supplier=Arrow+Electronics, ComponentLink2Description=https://www.seielect.com/catalog/SEI-Packaging.pdf?src-supplier=Digi-Key, ComponentLink2URL=https://www.seielect.com/catalog/SEI-Packaging.pdf?src-supplier=Digi-Key, ComponentLink3Description=https://www.seielect.com/catalog/SEI-RMCF_RMCP.pdf?src-supplier=Avnet, ComponentLink3URL=https://www.seielect.com/catalog/SEI-RMCF_RMCP.pdf?src-supplier=Avnet, ComponentLink4Description=https://www.verical.com/server-webapp/html/getDatasheet?partID=373264&src-supplier=Verical, ComponentLink4URL=https://www.verical.com/server-webapp/html/getDatasheet?partID=373264&src-supplier=Verical, Construction=Rectangular, Contact Plating=Tin,Matte, Depth=0.8mm, Features="Automotive AEC-Q200", Height=0.022inch, Length=1.55mm, Manufacturer Part Number=RMCF0603FT1K50, Military Standard=Not, Mount="Surface Mount", Number of Terminations=2, Packaging="Tape and Reel", Pricing 1="1=0.10000, 10=0.01700, 100=0.00680, 1000=0.00305, 2500=0.00264 (USD)", Radiation Hardening=No, RoHS=Yes, RoHS Compliant=Yes, Series=RMCF, Stock 1=1162707, Supplier 1=Digi-Key, Width=0.031inch
R2: library part RCS060347R0FKEA, "RES SMD 47 OHM 1% 1/4W 0603", Case/Package=0603, Manufacturer="Vishay Dale", Max Operating Temperature=155°C, Max Power Dissipation=250mW, Min Operating Temperature=-55°C, Package Quantity=5000, Resistor Type="Thick Film", Supplier Part Number 1=541-10470-1-ND, Temperature Coefficient=100ppm/°C, Tolerance=1%, Category="Chip SMD Resistors", ComponentLink1Description=http://www.vishay.com/docs/20065/rcse3.pdf?src-supplier=Digi-Key, ComponentLink1URL=http://www.vishay.com/docs/20065/rcse3.pdf?src-supplier=Digi-Key, Features="Automotive AEC-Q200", Height=0.02inch, Length=0.061inch, Manufacturer Part Number=RCS060347R0FKEA, Number of Terminations=2, Packaging="Tape and Reel", Pricing 1="1=0.15000, 10=0.13300, 100=0.05120, 1000=0.02252, 2500=0.01945 (USD)", Resistance=47R, RoHS=Yes, Stock 1=18040, Supplier 1=Digi-Key, Width=0.033inch
R3 R7: "RES 10K OHM 0.1% 1/10W 0603", Supplier Part Number 1=RNCF0603BTE10K0CT-ND, Supplier 1=Digi-Key
R5 R6: "Res Thick Film 0603 2.2K Ohm 1% 0.1W(1/10W) ±100ppm/C Pad SMD Automotive T/R", Case Code (Imperial)=0603, Case Code (Metric)=1608, Manufacturer="Stackpole Electronics", Max Operating Temperature=155°C, Max Power Dissipation=100mW, Min Operating Temperature=-55°C, Resistance=2.2kR, Resistor Type="Thick Film", Supplier Part Number 1=RMCF0603FT2K20CT-ND, Temperature Coefficient=100ppm/°C, Tolerance=1%, Case/Package=0603, Category="Chip SMD Resistors", ComponentLink1Description=http://components.arrow.com/part/dataview/46931077S7088098N1174?src-supplier=Arrow+Electronics, ComponentLink1URL=http://components.arrow.com/part/dataview/46931077S7088098N1174?src-supplier=Arrow+Electronics, ComponentLink2Description=https://www.seielect.com/catalog/SEI-Packaging.pdf?src-supplier=Digi-Key, ComponentLink2URL=https://www.seielect.com/catalog/SEI-Packaging.pdf?src-supplier=Digi-Key, ComponentLink3Description=https://www.seielect.com/catalog/SEI-RMCF_RMCP.pdf?src-supplier=Avnet+Asia, ComponentLink3URL=https://www.seielect.com/catalog/SEI-RMCF_RMCP.pdf?src-supplier=Avnet+Asia, ComponentLink4Description=https://www.seielect.com/catalog/SEI-RMCF_RMCP.pdf?src-supplier=Avnet, ComponentLink4URL=https://www.seielect.com/catalog/SEI-RMCF_RMCP.pdf?src-supplier=Avnet, ComponentLink5Description=http://www.seielect.com/Catalog/SEI-rmc.pdf?src-supplier=Future+Electronics, ComponentLink5URL=http://www.seielect.com/Catalog/SEI-rmc.pdf?src-supplier=Future+Electronics, Contact Plating=Tin,Matte, Features="Automotive AEC-Q200", Height=0.022inch, Lead Free="Lead Free", Length=0.061inch, Manufacturer Part Number=RMCF0603FT2K20, Mount="Surface Mount", Number of Terminations=2, Packaging="Tape and Reel", Power Rating=100mW, Pricing 1="1=0.10000, 10=0.01700, 100=0.00680, 1000=0.00305, 2500=0.00264 (USD)", Radiation Hardening=No, RoHS=Yes, RoHS Compliant=Yes, Series=RMCF, Stock 1=1700907, Supplier 1=Digi-Key, Width=0.031inch
SWD: "Male, 10 C, SMT, .050\" CC; 3.00mm Head/5.10mm Tail, Sf Mt; No GP, Nylon 9T, Brass, 105 C", Manufacturer=Sullins, Package Quantity=100, Supplier Part Number 1=S9012E-05-ND, Category="Headers and Wire Housings", ComponentLink1Description=https://datasheet.ciiva.com/726/grpb-20-2vwqs-rc2010958-c-726624.pdf?src-supplier=Digi-Key, ComponentLink1URL=https://datasheet.ciiva.com/726/grpb-20-2vwqs-rc2010958-c-726624.pdf?src-supplier=Digi-Key, Connector Type="Male Pin", Contact Mating Length=0.118inch, Contact Plating=Gold, Contact Type="Male Pin", Lead Free="Lead Free", Manufacturer Part Number=GRPB052VWQS-RC, Mount="Surface Mount", Number of Positions=10, Number of Rows=2, Packaging=Bulk, Pitch=0.05inch, Pricing 1="1=1.05000, 10=0.88400, 96=0.79396, 480=0.64963, 960=0.57744, 4992=0.52130 (USD)", RoHS=Yes, RoHS Compliant=Yes, Row Spacing=0.05inch, Stock 1=18930, Supplier 1=Digi-Key, Termination=Solder
U1: "LDO Regulator Pos 3.3V 1A 4-Pin(3+Tab) SOT-223 T/R / IC REG LDO 3.3V 1A SOT223", Case/Package=SOT-223, Dropout Voltage=1.11V, Manufacturer="Diodes Zetex", Max Input Voltage=18V, Max Operating Temperature=125°C, Max Output Current=1A, Max Power Dissipation=15W, Min Current Limit=1.1A, Min Input Voltage=2.7V, Min Operating Temperature=-40°C, Min Output Voltage=3.3V, Output Voltage Accuracy=2%, Package Quantity=1000, Quiescent Current=10mA, Supplier Part Number 1=ZLDO1117G33DICT-ND, Accuracy=2%, Category="Voltage Regulators - Linear", ComponentLink1Description=https://datasheet.ciiva.com/8078/608833-8078233.pdf?src-supplier=Element14, ComponentLink1URL=https://datasheet.ciiva.com/8078/608833-8078233.pdf?src-supplier=Element14, Height=1.7mm, Lead Free="Lead Free", Length=6.7mm, Manufacturer Part Number=ZLDO1117G33TA, Mount="Surface Mount", Nominal Output Voltage=3.3V, Number of Outputs=1, Number of Pins=3, Number of Regulators=1, Output Current=1A, Output Type=Fixed, Output Voltage=3.3V, Packaging="Tape and Reel", Polarity=Positive, Power Dissipation=15W, Pricing 1="1=0.54000, 10=0.45900, 25=0.42840, 100=0.34280, 250=0.31832, 500=0.26934 (USD)", Radiation Hardening=No, REACH SVHC="No SVHC", Reference Voltage=3.3V, RoHS=Yes, RoHS Compliant=Yes, Series=ZLDO1117, Stock 1=246729, Supplier 1=Digi-Key, Tolerance=2%, Weight=0.000282oz, Width=3.7mm
U2: library part CMP-1486-00007-1, "TVS Diode Array WE-TVS 2-Ch+VDD 5V SOT23", Breakdown Voltage=6V, Capacitance=2pF, Case/Package=SOT-23, Clamping Voltage=7.7V, Manufacturer="Wuerth Elektronik", Max Operating Temperature=125°C, Max Reverse Leakage Current=5A, Max Surge Current=6A, Min Operating Temperature=-40°C, Package Quantity=1, Power Line Protection=Yes, Reverse Stand Off Voltage=5V, Supplier Part Number 1=732-4473-1-ND, Test Current=1mA, Category=Diodes, ComponentLink1Description="Manufacturer URL", ComponentLink1URL=http://www.we-online.com, ComponentLink2Description=Datasheet, ComponentLink2URL=http://katalog.we-online.de/kataloge/eisos/media/pdf/82400102.pdf, ComponentLink3Description=https://datasheet.ciiva.com/15063/82400102-15063552.pdf?src-supplier=Digi-Key, ComponentLink3URL=https://datasheet.ciiva.com/15063/82400102-15063552.pdf?src-supplier=Digi-Key, ComponentLink4Description=https://datasheet.ciiva.com/22694/82400102-22694066.pdf?src-supplier=Element14, ComponentLink4URL=https://datasheet.ciiva.com/22694/82400102-22694066.pdf?src-supplier=Element14, ComponentLink5Description=https://datasheet.ciiva.com/1276/82400102-1276088.pdf?src-supplier=Element14, ComponentLink5URL=https://datasheet.ciiva.com/1276/82400102-1276088.pdf?src-supplier=Element14, ComponentLink6Description=https://datasheet.ciiva.com/26308/82400102-eng-tds-26308059.pdf?src-supplier=Distrelec, ComponentLink6URL=https://datasheet.ciiva.com/26308/82400102-eng-tds-26308059.pdf?src-supplier=Distrelec, ComponentLink7Description=https://datasheet.ciiva.com/48698/001086791-da-01-ml-tvs-diode-array-we-tvs-82400102-de-en-48698283.pdf?src-supplier=Conrad, ComponentLink7URL=https://datasheet.ciiva.com/48698/001086791-da-01-ml-tvs-diode-array-we-tvs-82400102-de-en-48698283.pdf?src-supplier=Conrad, Direction=Unidirectional, Element Configuration=Dual, ESD Protection=Yes, Height=1.16mm, Length=2.9mm, Manufacturer Part Number=82400102, Max Breakdown Voltage=6V, Min Breakdown Voltage=6V, Mount="Surface Mount", Number of Bidirectional Channels=2, Number of Channels=2, Number of Pins=6, Operating Supply Voltage=6V, PackageReference=SOT23_6L, Packaging="Tape and Reel", PartNumber=82400102, Peak Pulse Current=6A, Polarity=Bidirectional, Pricing 1="1=0.84000, 10=0.80000, 50=0.74600, 100=0.69300, 500=0.61300 (USD)", REACH SVHC=Unknown, Reverse Standoff Voltage=5V, RoHS=Yes, RoHS Compliant=Yes, Series=WE-TVS, Stock 1=490, Supplier 1=Digi-Key, Termination=SMD/SMT, Width=2.8mm, Working Voltage=5V